# Altium PCB MMBT3904LT1G.pcbdoc
Units mm, origin at the board's own origin, x right, y up, seen from the top; angles counter-clockwise.
Board outline 16.24 x 15.77 mm, 2 copper layers (Top Layer, Bottom Layer), stack 0 mm thick; 1 components, 0 nets, 3 pads, 0 vias.
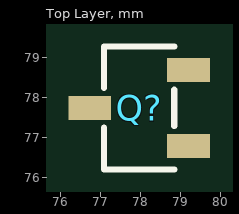
[diagram p0: Top Layer view]
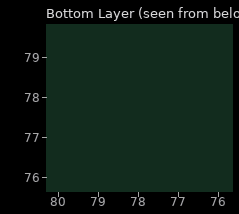
[diagram p1: Bottom Layer view, seen from below]

## Layer stack, top to bottom
Top Layer: signal copper (thickness not stored)
Bottom Layer: signal copper (thickness not stored)

## Board outline
86.091,69.85 69.85,69.85 69.85,85.623 86.091,85.623

## Components (designator, comment, footprint, x,y, rotation, side; value= is the part's Value field where it differs from the comment)
Q? "MMBT3904LT1G" SOT-23-3_L2.9-W1.6-P1.90-LS2.8-BR 77.97,77.737 r0 top

## Footprints (in the part's own frame and the unit in brackets; to place one, negate y for a bottom-side part, rotate by r counter-clockwise, add the part's x,y. Pads: shape width x height; smd on the part's side, far side on the other; paste and mask are expansions set on the pad)
SOT-23-3_L2.9-W1.6-P1.90-LS2.8-BR [mm]
  rect 1.069x0.599 smd: 1(1.234,-0.95) 2(1.234,0.95) 3(-1.234,0)
  silkscreen extent -0.88,-1.54 0.88,1.54

## Nets (pads, with @x,y where several pads share a name; then routed paths per layer and width w, separated by ;. In a path a pad name is that pad's centre, name@x,y a point inside that pad or via, vN(x,y) a via of type N, cw(c..) or ccw(c..) an arc to the next point about the centre after c; other vN are vias at no path point)
pads on no net: Q?.1 Q?.2 Q?.3